# Altium PCB GPS_PCB.PcbDoc
Units mm, origin at the board's own origin, x right, y up, seen from the top; angles counter-clockwise.
Board outline 41.78 x 44.96 mm, 4 copper layers (Top Layer, Inner Layer L1, Inner Layer L3, Bottom Layer), stack 1.564 mm thick; 22 components, 16 nets, 77 pads, 50 vias.
Unrouted connection lines stored in the file: 1.
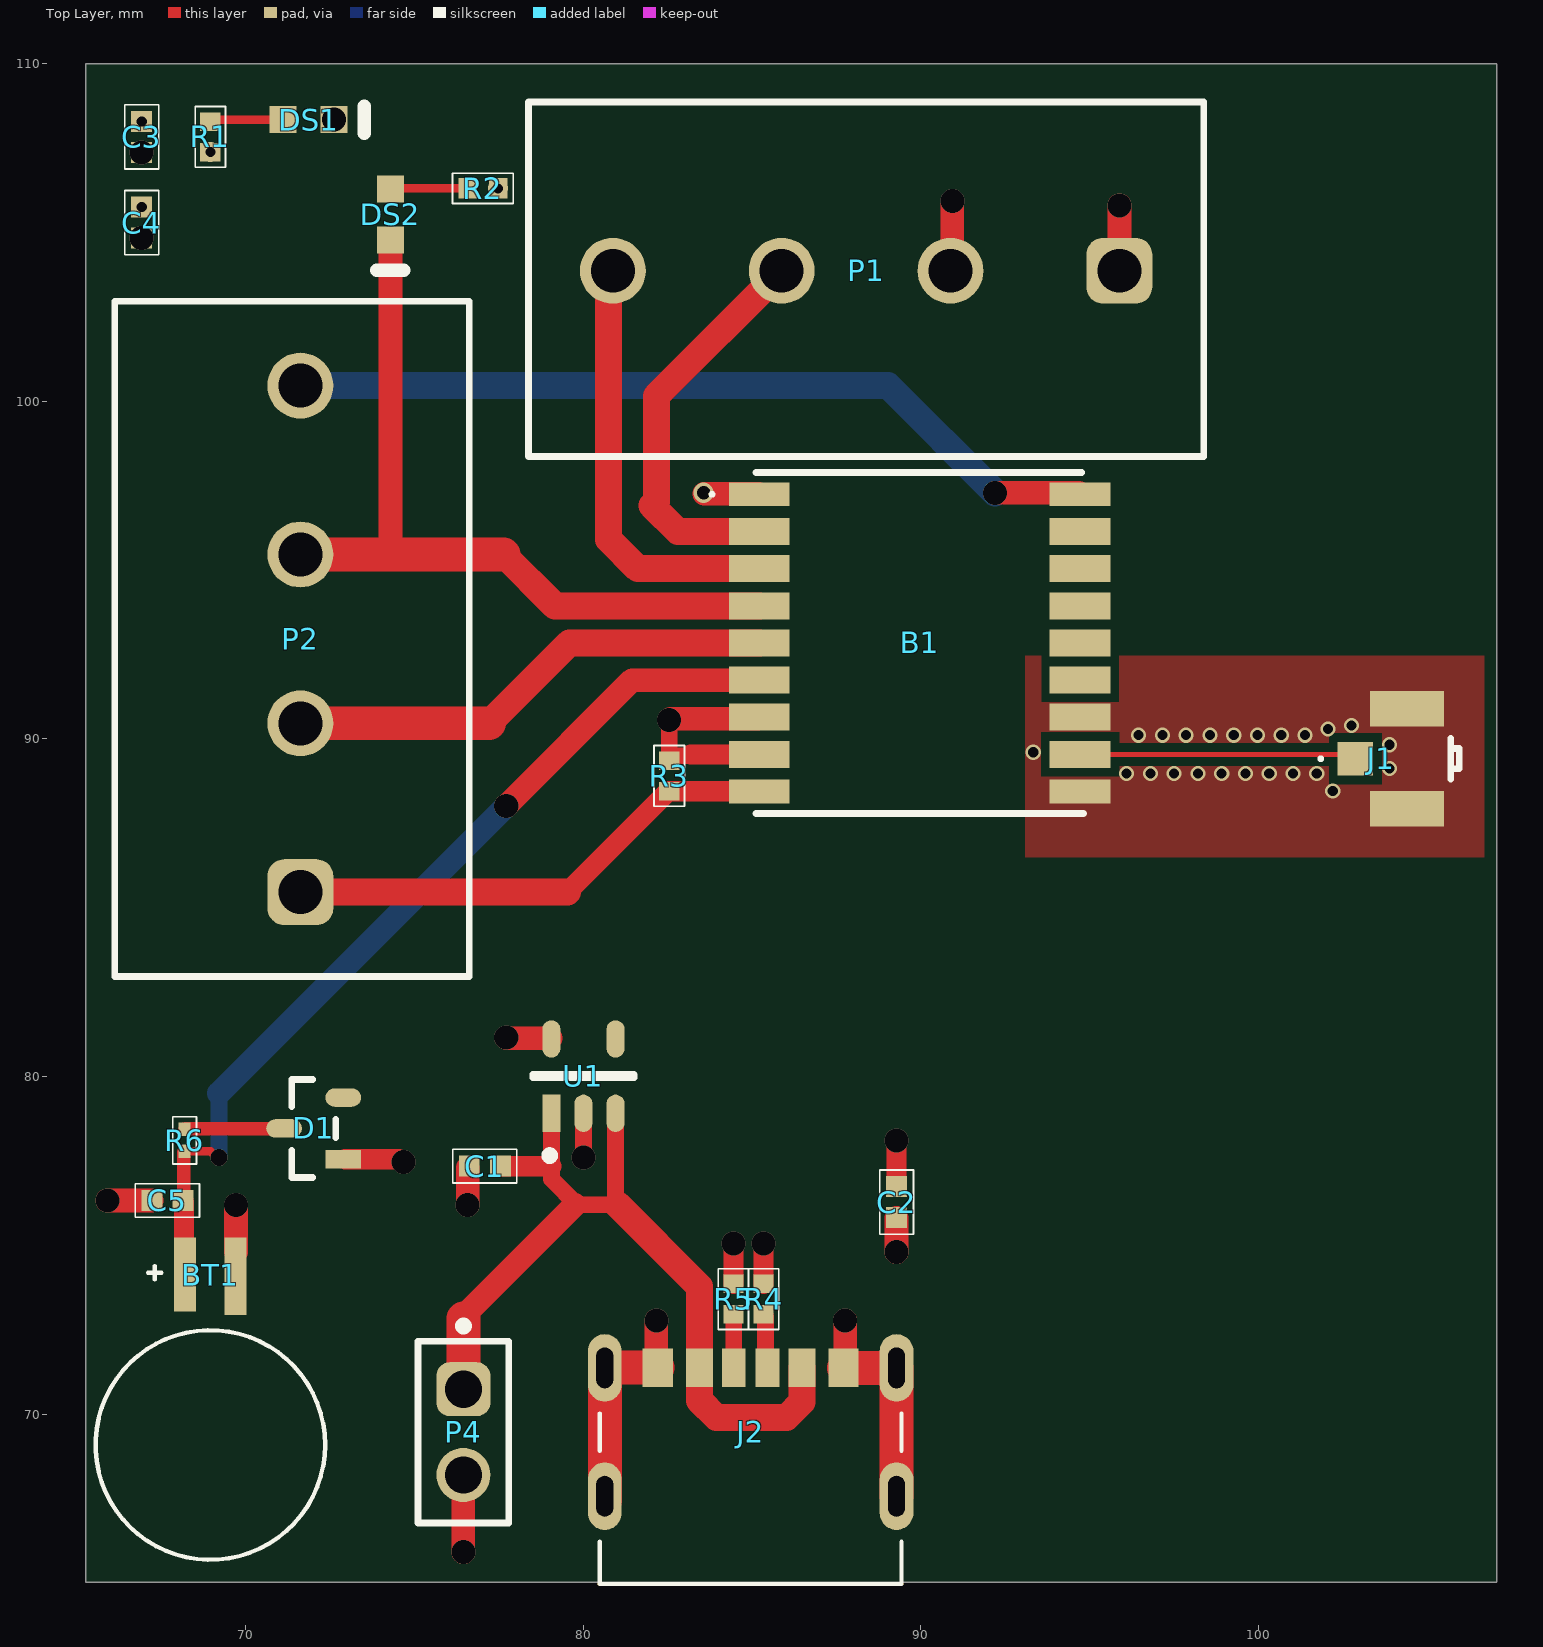
[diagram p0: Top Layer view]
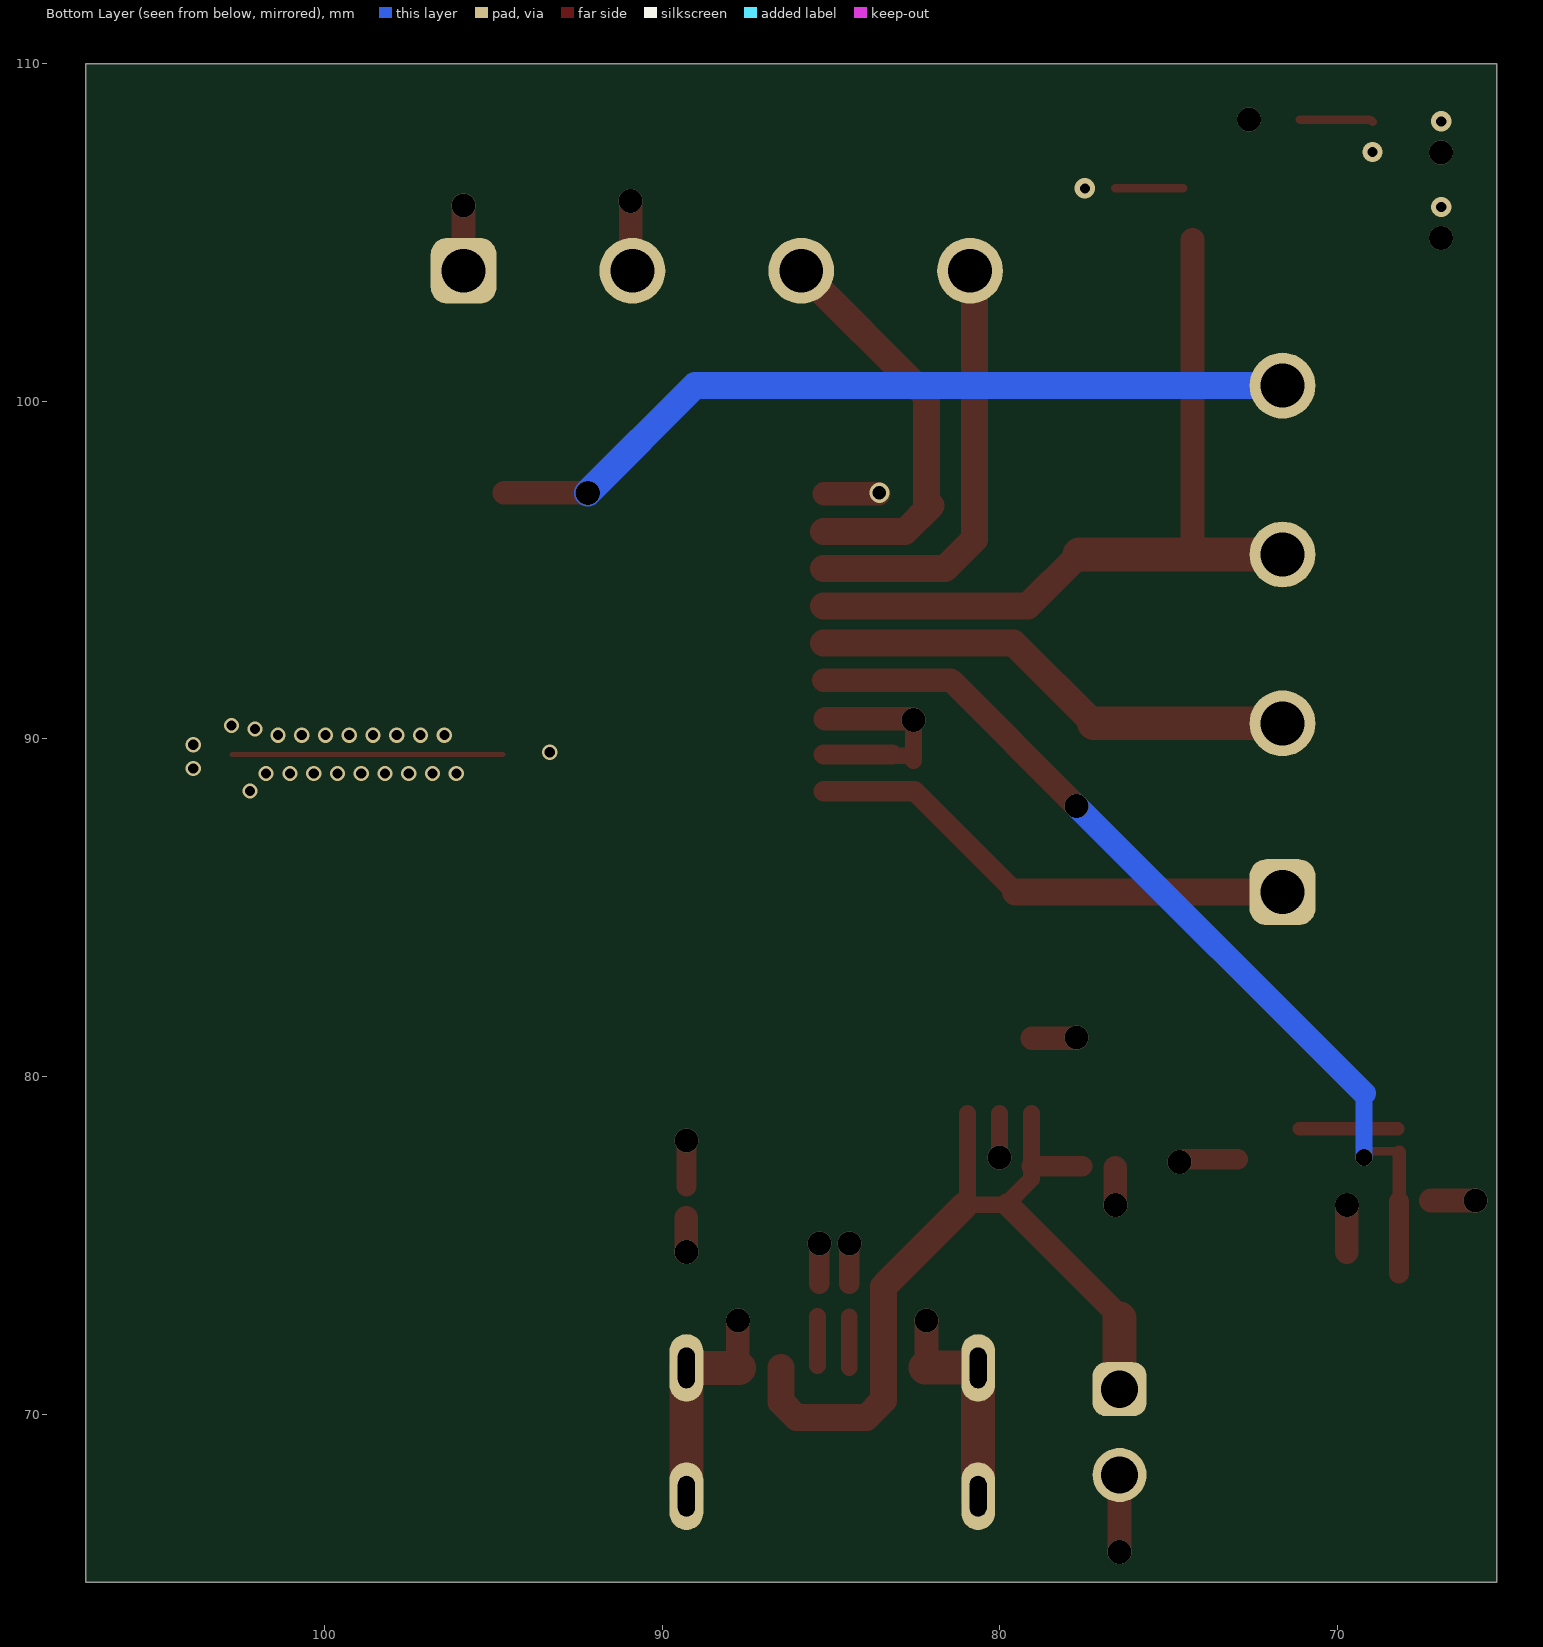
[diagram p1: Bottom Layer view, seen from below]
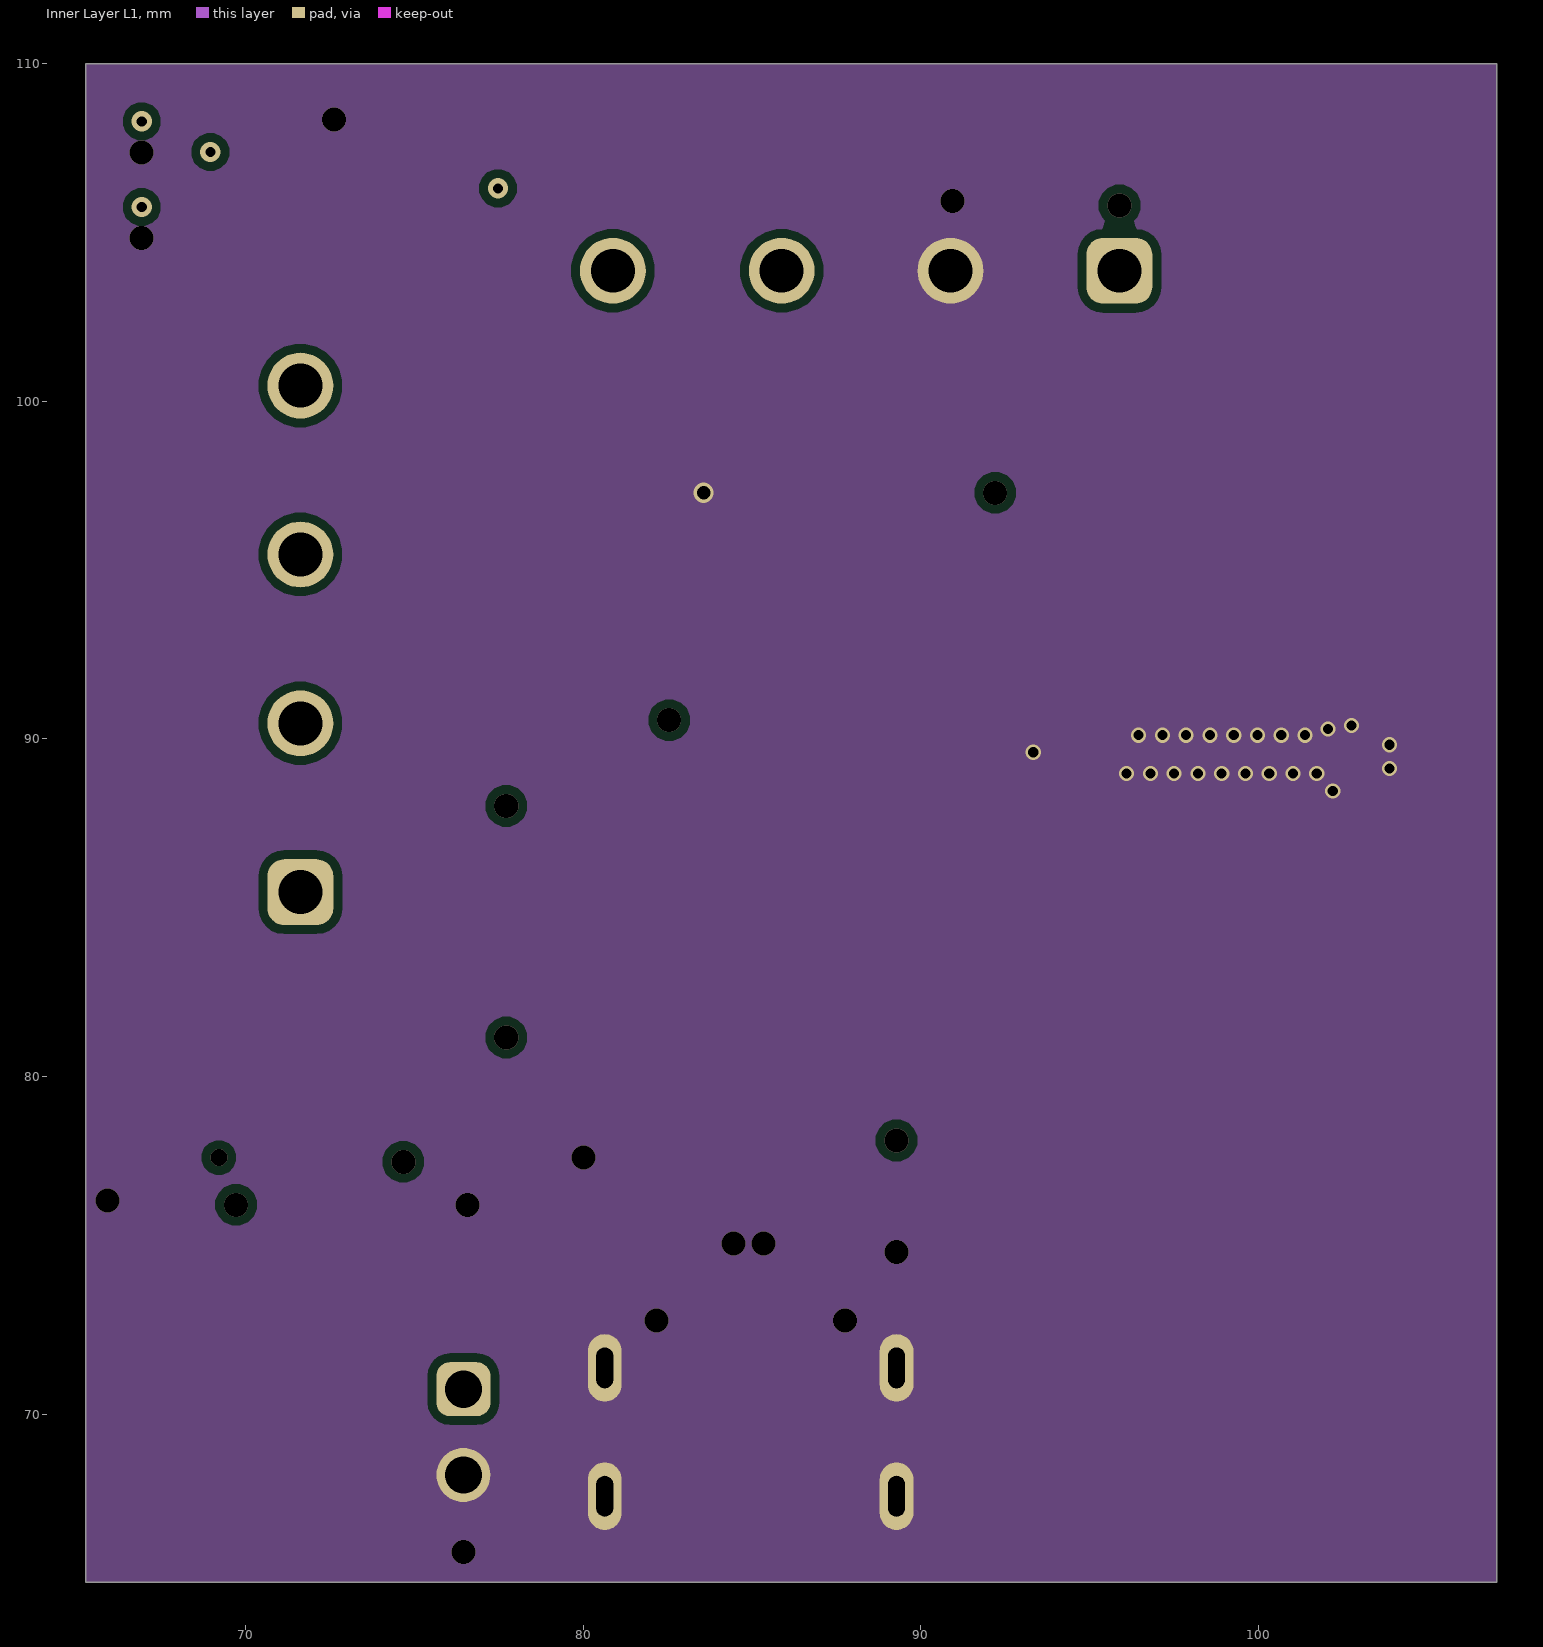
[diagram p2: Inner Layer L1]
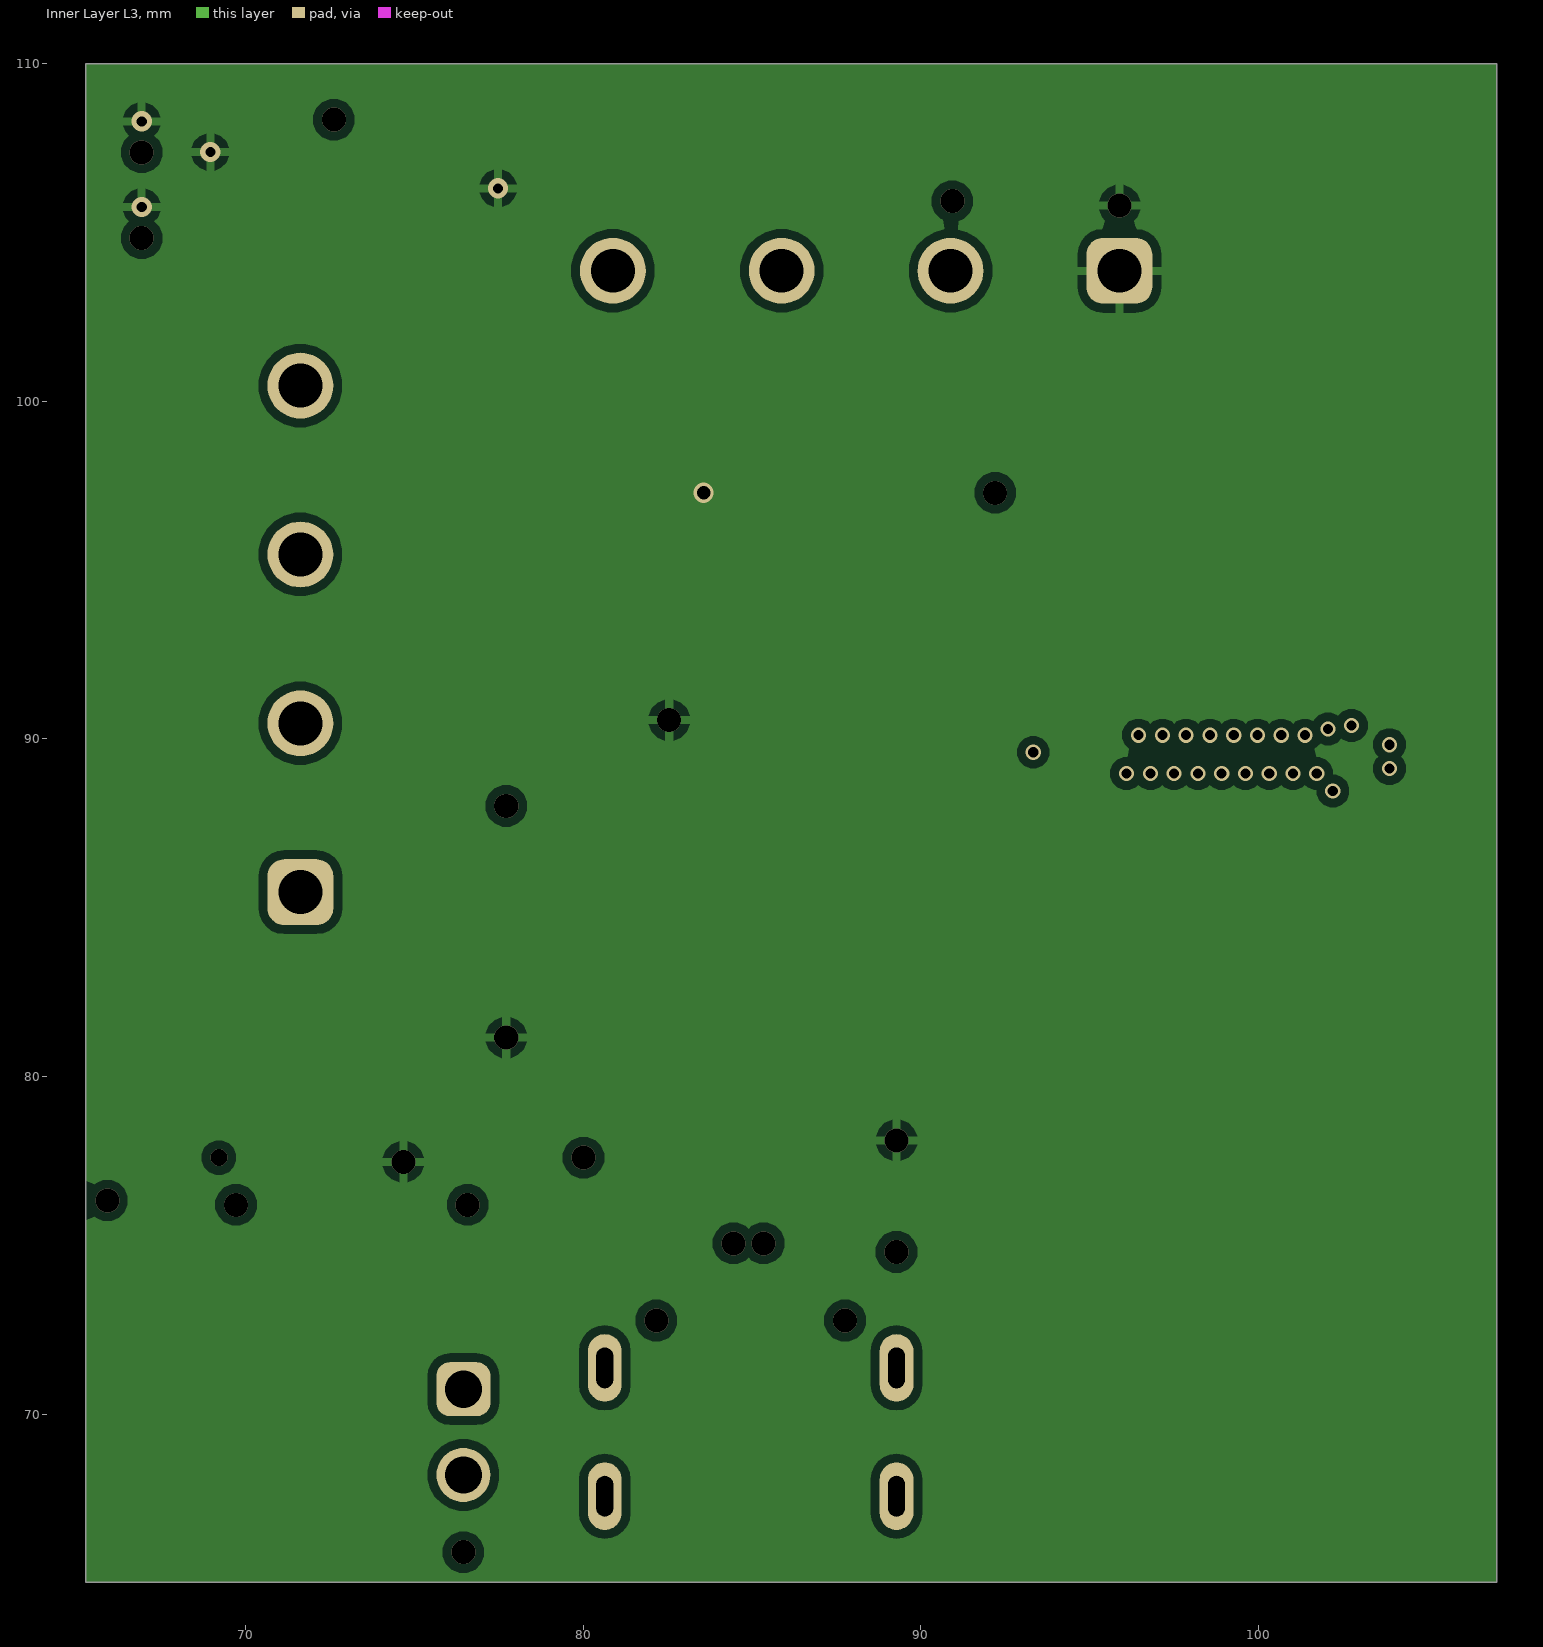
[diagram p3: Inner Layer L3]
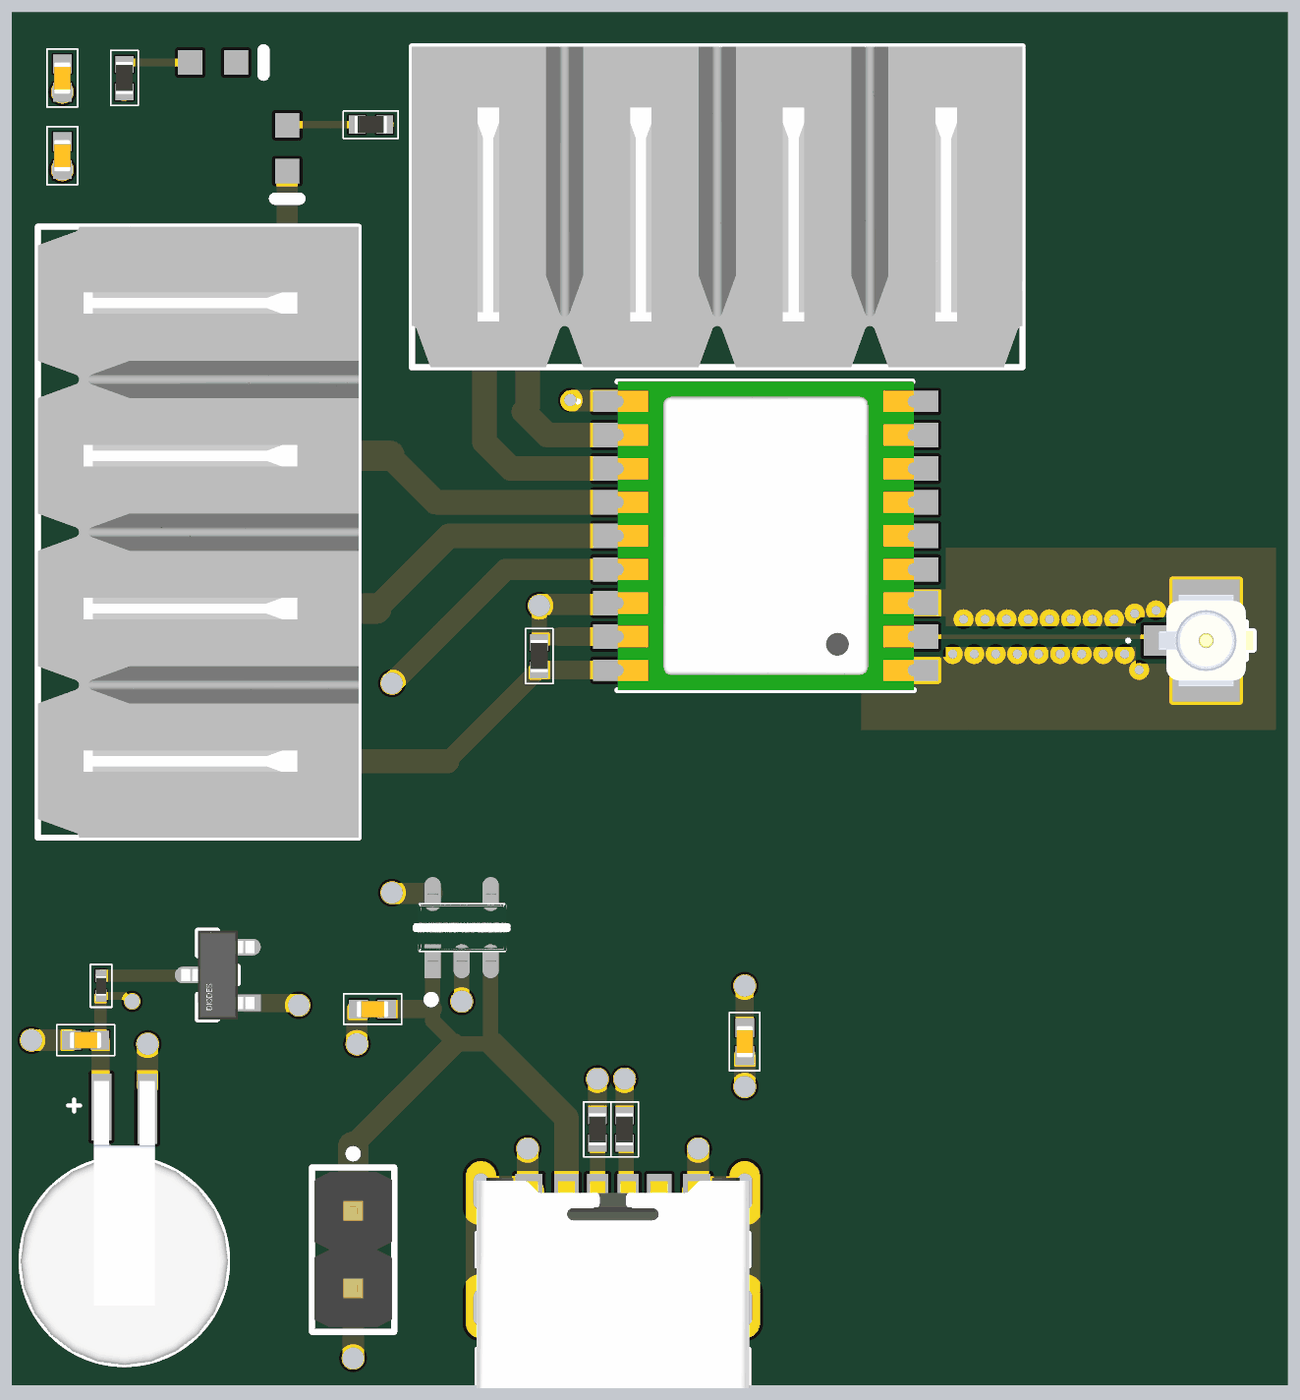
[diagram p4: 3D render of the assembled board from above, using the file's embedded part models]

## Layer stack, top to bottom
Top Solder: solder mask 0.0152, Solder Resist, Dk 3.8
Top Layer: signal copper 0.035
Prepeg 1: prepreg 0.0994, PP-015, Dk 4.1
Inner Layer L1: signal copper 0.0152
Core: core 1.265, FR-4, Dk 4.6
Inner Layer L3: signal copper 0.0152
Prepeg 2: prepreg 0.0994, PP-015, Dk 4.1
Bottom Layer: signal copper 0.035
Bottom Solder: solder mask 0.0152, Solder Resist, Dk 3.8

## Board outline
65.278,65.024 107.061,65.024 107.061,109.982 65.278,109.982

## Design rules (kind name [scope] priority, off if disabled: settings)
Clearance [All] p1: gap=0.254 ignorepadtopadclearanceinfootprint=FALSE
PolygonConnect PolygonConnect_2 [IsShieldingVia] p1: connectstyle=Direct reliefconductorwidth=0.254 reliefentries=4 polygonreliefangle="90 Angle" airgapwidth=0.254
PolygonConnect [InNet('GND')] p2: connectstyle=Direct reliefconductorwidth=0.254 reliefentries=4 polygonreliefangle="90 Angle" airgapwidth=0.254
PolygonConnect PolygonConnect_1 [All] p3: connectstyle=Relief reliefconductorwidth=0.254 reliefentries=4 polygonreliefangle="90 Angle" airgapwidth=0.254
RoutingVias [All] p1: holewidth=0.711 width=1.27 viastyle="Through Hole" minholewidth=0.711 minwidth=1.27 maxholewidth=0.711 maxwidth=1.27
SolderMaskExpansion [All] p1: expansion=0.102 istentingtop=FALSE
SupplyNets "Schematic Supply Nets" [InNet('GND')] p1: voltage=0.000
Width [InNetClass('RF')] p1: maxlimit=0.148 minlimit=0.148 preferedwidth=0.148 impedanceprofiledriven=TRUE impedanceprofileid={130DF238-4679-42AC-8F3F-ED2540BAD80D} impedanceprofilevalue=50.000000 minimp=50.000000 maximp=50.000000 favimp=50.000000
Width Width_1 [All] p2: maxlimit=5 minlimit=0.01 preferedwidth=0.254 minimp=50.000000 maximp=50.000000 favimp=50.000000
30 further rules are at their usual default settings.

## Classes and differential pairs
net class RF: RFIN

## Components (designator, comment, footprint, x,y, rotation, side; value= is the part's Value field where it differs from the comment)
B1 "MAX-M10M-00B" MAXM10M00B 89.967,92.837 r180 top
BT1 "MS621FE-FL11E" BAT_MS621FE-FL11E 68.961,69.088 r90 top
C1 "1uF" CAP_0402 77.089,77.343 r0 top
C2 "1uF" CAP_0402 89.281,76.279 r90 top
C3 "100 nF" CAP_0402 66.929,107.823 r90 top
C4 "1 uF" CAP_0402 66.929,105.283 r90 top
C5 "1 uF" CAP_0402 67.691,76.327 r0 top
D1 "BAT54-7-F" FP-SOT23-IPC_C 72.021,78.46 r180 top value=10pF
DS1 "HSMH-C190" HSMH-C190 71.87,108.331 r0 top
DS2 "HSMH-C190" HSMH-C190 74.295,105.525 r270 top
J1 "U.FL-R-SMT_10_" UFLRSMT10 104.394,89.408 r270 top
J2 "UJC-HP-3-SMT-TR" CUI_UJC-HP-3-SMT-TR 84.961,71.369 r0 top
P1 "691386700004" CMP-1502-02092-3 88.38,103.607 r180 top
P2 "691386700004" CMP-1502-02092-3 71.378,92.957 r90 top
P4 "61300211121" 61300211121 76.454,69.469 r270 top
R1 "330 Ω" RES_0402 68.961,107.823 r90 top
R2 "330 Ω" RES_0402 77.031,106.299 r180 top
R3 "10 kΩ" RES_0402 82.55,88.9 r90 top
R4 "5.1 kΩ" RES_0402 85.344,73.406 r270 top
R5 "5.1 kΩ" RES_0402 84.455,73.406 r90 top
R6 "3.3 kΩ" RES_0201 68.199,78.105 r270 top
U1 "AP2112K-3.3TRG1" FP-SOT25-IPC_C 80.01,80.01 r90 top

## Footprints (in the part's own frame and the unit in brackets; to place one, negate y for a bottom-side part, rotate by r counter-clockwise, add the part's x,y. Pads: shape width x height; smd on the part's side, far side on the other; paste and mask are expansions set on the pad)
61300211121 [mm] "Pin Header, pitch 2.54 mm, THT, Vertical, single row, 2p"
  rrect50% 1.6x1.6 hole 1.1: 1(-1.27,0)
  round 1.6 hole 1.1: 2(1.27,0)
  silkscreen extent -3.26,-1.35 2.69,1.35, body extent -2.54,-1.27 2.54,1.27, height 8.57
BAT_MS621FE-FL11E [mm]
  rect 2.3x0.65 smd: NEG(5,-0.75)
  rect 2.2x0.65 smd: POS(5.05,0.75)
  silkscreen extent -3.4,-3.4 5.3,3.4, body extent -3.4,-3.4 5.9,3.4, height 2.8
CAP_0402 [mm]
  rect 0.62x0.62 smd mask+0.05: 1(-0.46,0) 2(0.46,0)
  silkscreen extent -0.95,-0.5 0.95,0.5, body extent -0.53,-0.28 0.53,0.28, height 0.55
CMP-1502-02092-3 [mm] "5.00mm - PCB Header ( Horizontal / Vertical ), 04p"
  rrect50% 1.95x1.95 hole 1.3: 1(-7.5,-0.25)
  round 1.95 hole 1.3: 2(-2.5,-0.25) 3(2.5,-0.25) 4(7.5,-0.25)
  silkscreen extent -10,-5.25 10,5.25, body extent -10,-5.25 10,5.25, height 11
CUI_UJC-HP-3-SMT-TR [mm]
  rect 0.7x1.15 smd: A5(-0.5,0.005) B5(0.5,0.005)
  rect 0.8x1.15 smd: A9(1.52,0.005) B9(-1.52,0.005)
  rect 0.9x1.15 smd: A12(2.75,0.005) B12(-2.75,0.005)
  oval 1x2 hole 0.5 slot 1.2 at 90 deg: S1(-4.32,0) S2(4.32,0) S3(-4.32,-3.8) S4(4.32,-3.8)
  silkscreen extent -4.47,-6.4 4.47,-1.35, body extent -4.47,-6.44 4.47,0.46, height 3.3
FP-SOT23-IPC_C [mm]
  rect 1.059x0.547 smd paste+0 mask+0: 1(-0.877,0.915)
  rrect100% 1.059x0.547 smd paste+0 mask+0: 2(-0.877,-0.915) 3(0.877,0)
  silkscreen extent -0.65,-1.45 0.65,1.45, body extent -1.51,-1.55 1.51,1.55, height 0.25
FP-SOT25-IPC_C [mm]
  rect 1.107x0.536 smd paste+0 mask+0: 1(-1.101,0.95)
  rrect100% 1.107x0.536 smd paste+0 mask+0: 2(-1.101,0) 3(-1.101,-0.95) 4(1.101,-0.95) 5(1.101,0.95)
  silkscreen extent -2.48,-1.5 0.05,1.5, body extent -1.75,-1.6 1.75,1.6, height 0.25
HSMH-C190 [mm] "SMD, 2-Leads, Body 1.6x0.8mm, Height 0.9mm"
  rect 0.8x0.8 smd: 1(-0.75,0) 2(0.75,0)
  silkscreen extent 1.65,-0.4 1.65,0.4, body extent -0.8,-0.4 0.8,0.4, height 0.9
MAXM10M00B [mm]
  rect 1.8x0.7 smd: 1(4.75,-4.4) 9(4.75,4.4) 10(-4.75,4.4) 18(-4.75,-4.4)
  rect 1.8x0.8 smd: 2(4.75,-3.3) 3(4.75,-2.2) 4(4.75,-1.1) 5(4.75,0) 6(4.75,1.1) 7(4.75,2.2) 8(4.75,3.3) 11(-4.75,3.3) 12(-4.75,2.2) 13(-4.75,1.1) 14(-4.75,0) 15(-4.75,-1.1) 16(-4.75,-2.2) 17(-4.75,-3.3)
  silkscreen extent -4.85,-5.05 6.2,5.05, body extent -4.85,-5.05 4.85,5.05, height 2.5
RES_0201 [mm]
  rect 0.4x0.35 smd mask+0.05: 1(-0.325,0) 2(0.325,0)
  silkscreen extent -0.7,-0.35 0.7,0.35, body extent -0.32,-0.17 0.32,0.17, height 0.26
RES_0402 [mm]
  rect 0.55x0.6 smd mask+0.05: 1(-0.45,0) 2(0.45,0)
  silkscreen extent -0.9,-0.45 0.9,0.45, body extent -0.53,-0.28 0.53,0.28, height 0.4
UFLRSMT10 [mm]
  rect 1x1.05 smd: 1(0,-1.525)
  rect 1.05x2.2 smd: 2(-1.475,0) 3(1.475,0)
  silkscreen extent -0.6,-2.6 0.6,1.55, body extent -1.5,-1.55 1.5,1.55, height 1.25

## Part data
B1: "GPS Modules u-blox M10 GNSS LCC module, firmware in ROM, crystal oscillator", Manufacturer_Name=u-blox, Mouser Part Number=377-MAX-M10M-00B, Arrow Part Number=MAX-M10M-00B, Arrow Price/Stock=https://www.arrow.com/en/products/max-m10m-00b/u-blox?utm_currency=USD&region=nac, Datasheet Link=https://content.u-blox.com/sites/default/files/documents/MAX-M10M_IntegrationManual_UBX-22038241.pdf, Geometry.Height=2.7mm, Manufacturer_Part_Number=MAX-M10M-00B, Mouser Price/Stock=https://www.mouser.co.uk/ProductDetail/u-blox/MAX-M10M-00B?qs=A6eO%252BMLsxmQGh8%2FJ1ZmexA%3D%3D
BT1: "Coin, 6.8mm 3 V Lithium Battery Rechargeable (Secondary) 5.5mAh", Package="QFP-128 Seiko", Availability="In Stock", Check_prices=https://www.snapeda.com/parts/MS621FE-FL11E/Seiko+Instruments/view-part/?ref=eda, MF="Seiko Instruments", MP=MS621FE-FL11E, Price=None, Purchase-URL=https://pricing.snapeda.com/search/part/MS621FE-FL11E/?ref=eda, SnapEDA_Link=https://www.snapeda.com/parts/MS621FE-FL11E/Seiko+Instruments/view-part/?ref=snap
C1 C2 C3 C4 C5: library part CAP_0402, "Capacitor SMD 0402 Generic", Capacitance="100 pF", LCSC Part Number=C106200, Manufacturer=YAGEO, Manufacturer Part Number=CC0402JRNPO9BN101, Tolerance=5%
D1: library part CMP-0303-00002-2, "DIODE SCHOTTKY 30V 200MA SOT23-3", Capacitance=10pF, Forward Current=200mA, Manufacturer="Diodes Inc.", Max Junction Temp=+150°C, Max Repetitive Reverse Voltage=30V, Max Surge Forward Current=600mA, Package=SOT23, Peak Reverse Current=2uA, Temperature="-65°C to +150°C", Temperature Range Low=-65°C, Automotive=No, Automotive Grade=NA, Category=Diode, ComponentLink2Description=Datasheet, ComponentLink2URL=https://www.diodes.com/assets/Datasheets/ds11005.pdf, Device Class L1="Discrete Semiconductors", Device Class L2=Diodes, Device Class L3="Schottky Diodes", Digikey Description="DIODE SCHOTTKY 30V 200MA SOT23-3", Footprint Url=https://www.diodes.com/assets/Package-Files/SOT23.pdf, Height=1.1mm, Lead Free=Yes, Manufacturer Part Number=BAT54-7-F, Mouser Description="Switching diode SOT-23 30 V 200 mA | Diodes Incorporated BAT547F (Switching diode SOT-23 30 V 200 mA Diodes).", Octopart=https://octopart.com/bat54-7-f-diodes+inc.-39681803, Reverse Voltage=30V, RoHS=TRUE, Standoff Height=0.013mm, Temperature Range High=+150°C
DS1 DS2: "LED Uni-Color Red, 65 mW, 20 mA, -40 to 85 degC, 2-Pin SMD, RoHS, Tape and Reel", Current Rating="1 A", Max Operating Temperature="85 degC", Min Operating Temperature="-30 degC", Package Quantity=2000, ComponentLink1Description="Manufacturer URL", ComponentLink1URL=http://www.avagotech.com/, ComponentLink2Description=Datasheet, ComponentLink2URL=http://docs.avagotech.com/docs/AV02-0551EN, ComponentLink3Description="Package Specification", ComponentLink3URL=http://www.fairchildsemi.com/dwg/MA/MA03D.pdf, Connector Type=USB, Contact Material=Copper, Contact Plating=Gold, DatasheetVersion=Mar-12, Gender=Male, Height="2.8 mm", Lead Pitch="0.65 mm", Length="7.5 mm", Mount="Surface Mount", PackageDescription="2-Pin Surface Mount Device, Body 1.6 x 0.8 mm, Height 0.9 mm", PackageReference=HSMX-C190, Packaging="Tape and Reel", Pins=5, REACH SVHC="No SVHC", RoHSCompliant=true, Width="5.6 mm"
J1: "U.FL (UMCC) Connector Receptacle, Male Pin 50 Ohms Surface Mount Solder", Arrow Part Number=U.FL-R-SMT(10), Manufacturer_Name=Hirose, Mouser Part Number=798-U.FL-R-SMT10, Arrow Price/Stock=https://www.arrow.com/en/products/u.fl-r-smt-10/hirose-electric?utm_currency=USD&region=nac, Datasheet Link=https://eu.mouser.com/datasheet/2/185/hiros05388_1-2269186.pdf, Geometry.Height=1.45mm, Manufacturer_Part_Number=U.FL-R-SMT(10), Mouser Price/Stock=https://www.mouser.co.uk/ProductDetail/Hirose-Connector/U.FL-R-SMT10?qs=Ux3WWAnHpjBT1CWD8UMEMQ%3D%3D
J2: Package=None, Availability=Unavailable, MP=UJC-HP-3-SMT-TR, Price=None
P1 P2: library part CMP-1502-02092-3, "Terminal Block, 5.00MM, Male Pcb Horizontal/vertical Cab Divisible, 4 Pins", Color=Grey, Current=14A, Max Operating Temperature=130°C, Min Operating Temperature=-30°C, Voltage=300V, Lead Pitch=5mm, Mount="Through Hole", Number of Levels=1, Number of Pins=4, Number of Positions=4, Number of Positions Per Level=4, Orientation=Vertical, Packaging=Box, Pitch=5.0038mm, RoHS=Compliant, Termination=Solder
P4: library part CMP-1712-00002-7, "THT Vertical Pin Header WR-PHD, Pitch 2.54 mm, Single Row, 2 pins", Color=Black, Contact Resistance=20mΩ, Current Rating=3A, Max Operating Temperature=105°C, Min Operating Temperature=-40°C, Operating Supply Voltage=250V, Connector Type="Male Pin", Contact Gender=Male, Contact Material=Gold, Contact Mating Length=5.9944mm, Contact Plating=Gold, Gender=Male, Height=8.94mm, Housing Material=PBT, Lead Free="Lead Free", Lead Pitch=2.54mm, Mount="Through Hole", Number of Contacts=2, Number of Pins=2, Number of Positions=2, Number of Rows=1, Orientation=Vertical, Packaging=Bulk, Pitch=2.54mm, REACH SVHC=No, RoHS=Compliant, Termination="Through Hole", Voltage Rating=250V
R1 R2 R3 R4 R5: library part RES_0402, "Resistor SMD 0402 Generic", LCSC Part Number=C93947, Manufacturer=YAGEO, Manufacturer Part Number=RC0402FR07150KL, Resistance="150 kOhm", Tolerance=1%
R6: library part RES_0201, "Resistor SMD 0201 Generic", LCSC Part Number=C852221, Manufacturer=YAGEO, Manufacturer Part Number=RT0201BRD07200RL, Resistance="200 Ohm", Tolerance=0.1%
U1: library part CMP-12756-000035-1, "IC REG LINEAR 3.3V 600MA SOT25", Case/Package=SOT-23-5, Dropout Voltage=250mV, Max Input Voltage=6V, Max Operating Temperature=85°C, Max Output Current=600mA, Min Input Voltage=2.5V, Min Operating Temperature=-40°C, Output Voltage=3.3V, Package Quantity=1, Quiescent Current=55uA, Accuracy=1.5%, Height=1.3mm, Lead Free="Lead Free", Length=3.1mm, Mount="Surface Mount", Number of Outputs=1, Number of Pins=5, Number of Regulators=1, Output Current=600mA, Output Type=Fixed, Packaging="Tape and Reel", Polarity=Positive, Width=1.7mm

## Via types
v1: diameter 0.45, hole 0.3, Top Layer to Bottom Layer, 23 vias
v2: diameter 0.711, hole 0.711, Top Layer to Bottom Layer, 21 vias
v3: diameter 0.6, hole 0.3, Top Layer to Bottom Layer, tented both sides, 4 vias
v4: diameter 0.6, hole 0.4, Top Layer to Bottom Layer, 1 vias
v5: diameter 0.5, hole 0.5, Top Layer to Bottom Layer, 1 vias

## Nets (pads, with @x,y where several pads share a name; then routed paths per layer and width w, separated by ;. In a path a pad name is that pad's centre, name@x,y a point inside that pad or via, vN(x,y) a via of type N, cw(c..) or ccw(c..) an arc to the next point about the centre after c; other vN are vias at no path point)
3V3: B1.7 B1.8 C2.2 C3.2 C4.2 D1.1 P1.1 R1.1 R2.1 R3.2 U1.5 | length 12.9
  Top Layer w0.254: D1.1 D1.1@72.924,77.571 ; v2(77.724,81.153) v2@77.745,81.132 ; U1.5@79.039,81.132 U1.5 ; 83.148,89.498 83.187,89.537
  Top Layer w0.5: D1.1@72.924,77.568 D1.1@72.947,77.545 ; v2@74.544,77.545 74.619,77.47 v2(74.676,77.47) ; R3.2 v2(82.55,90.551) v2@82.59,90.591 ; R3.2@82.698,89.498 83.148,89.498 ; B1.7@85.171,90.591 B1.7
  Top Layer w0.6: D1.1@72.947,77.545 v2@74.544,77.545 ; 83.187,89.537 B1.8 ; C2.2 v2(89.281,78.105)
  Top Layer w0.7: v2@77.745,81.132 U1.5@79.039,81.132 ; v2@82.59,90.591 B1.7@85.171,90.591 ; P1.1@95.885,103.889 95.883,103.891 95.883,105.789 v2(95.885,105.791)
  other v3: 66.929,105.743 77.481,106.299 68.961,107.373 66.929,108.283
EINT: B1.5 P2.2 | length 14.6
  Top Layer w0.8: 77.212,90.457 79.592,92.837 B1.5
  Top Layer w1: P2.2 77.212,90.457
GND: B1.1 B1.10 B1.12 BT1.NEG C1.1 C2.1 C3.1 C4.1 C5.1 DS1.2 J1.2 J1.3 J2.A12 J2.B12 J2.S1 J2.S2 J2.S3 J2.S4 P1.2 P4.2 R4.1 R5.2 U1.2 | length 27.8
  Top Layer w0.254: C1.1@76.581,77.295 C1.1 ; v4(83.566,97.282) v4@83.589,97.259 ; B1.1@85.195,97.259 B1.1 ; J2.A12 J2.A12@87.716,71.369
  Top Layer w0.5: v2(80.01,77.597) U1.2
  Top Layer w0.6: R5.2 v2(84.455,75.057) ; R4.1 v2(85.344,75.057)
  Top Layer w0.7: v2(65.913,76.327) C5.1 ; BT1.NEG@69.723,74.803 69.723,76.121 ; v2(76.454,65.913) P4.2 ; v2(76.581,76.2) C1.1@76.581,77.295 ; J2.B12@82.169,71.42 v2(82.169,72.771) ; v4@83.589,97.259 B1.1@85.195,97.259 ; J2.A12@87.757,71.42 v2(87.757,72.771) ; v2(89.281,74.803) C2.1 ; P1.2@90.93,103.891 v2@90.93,105.789
  Top Layer w1: J2.S3@80.645,67.442 J2.S1@80.645,71.242 ; J2.S1@80.645,71.379 J2.B12@82.21,71.379 ; J2.A12@87.716,71.369 J2.S2 J2.S4
  other v1: 102.2,88.448 96.093,88.968 96.797,88.968 97.501,88.968 98.205,88.968 98.909,88.968 99.613,88.968 100.317,88.968 101.021,88.968 101.725,88.968 103.882,89.12 93.329,89.599 103.882,89.824 96.449,90.106 97.153,90.106 97.857,90.106 98.561,90.106 99.265,90.106 99.969,90.106 100.673,90.106 101.377,90.106 102.056,90.291 102.752,90.396
  other v2: 66.929,104.823 90.932,105.918 66.929,107.363 72.62,108.331
NetD1_3: D1.3 R6.1 | length 2.9
  Top Layer w0.254: R6.1@68.212,78.443 R6.1@68.214,78.445 ; D1.3@71.13,78.445 D1.3
  Top Layer w0.4: R6.1@68.214,78.445 D1.3@71.13,78.445
NetDS1_1: DS1.1 R1.2 | length 2.2
  Top Layer w0.254: R1.2 cw(c69.101,108.133) 69.101,108.331 DS1.1
NetDS2_1: DS2.1 R2.2 | length 2
  Top Layer w0.254: DS2.1@74.568,106.299 R2.2
NetJ2_A5: J2.A5 R5.1 | length 1.5
  Top Layer w0.254: R5.1@84.457,72.887 R5.1@84.459,72.885 ; J2.A5@84.459,71.376 J2.A5
  Top Layer w0.5: J2.A5@84.459,71.376 R5.1@84.459,72.885
NetJ2_B5: J2.B5 R4.2 | length 1.6
  Top Layer w0.254: R4.2 R4.2@85.402,72.897 ; J2.B5@85.402,71.433 J2.B5
  Top Layer w0.5: J2.B5@85.402,71.433 R4.2@85.402,72.897
PPS: B1.4 DS2.2 P2.3 | length 23.5
  Top Layer w0.7: 74.295,95.457 DS2.2
  Top Layer w0.8: 77.642,95.457 79.162,93.937 B1.4
  Top Layer w1: P2.3 74.295,95.457 77.642,95.457
RFIN: B1.11 J1.1 | length 8
  Top Layer w0.148: B1.11 J1.1@102.74,89.537
RST: B1.9 P2.1 R3.1 | length 14.8
  Top Layer w0.254: R3.1@82.525,88.45 R3.1 ; B1.9@85.211,88.444 B1.9
  Top Layer w0.6: 79.532,85.457 R3.1@82.525,88.45 ; R3.1@82.556,88.444 B1.9@85.211,88.444
  Top Layer w0.8: P2.1 79.532,85.457
RXD: B1.3 P1.4 | length 12.8
  Top Layer w0.8: P1.4 80.753,103.73 80.753,95.904 81.62,95.037 B1.3
SAFE: B1.18 P2.4 | length 24.4
  Top Layer w0.7: v2(92.202,97.282) B1.18@94.672,97.282
  Bottom Layer w0.8: P2.4 89.027,100.457 v2(92.202,97.282)
TXD: B1.2 P1.3 | length 12
  Top Layer w0.8: B1.2 82.806,96.137 82.042,96.901 82.169,97.028 82.169,100.146 P1.3
VBAT: B1.6 BT1.POS C5.2 R6.2 | length 27.7
  Top Layer w0.254: C5.2 C5.2@68.181,76.297 ; R6.2@68.175,77.756 R6.2 68.965,77.78 69.148,77.597 v5(69.215,77.597) ; BT1.POS@68.181,74.168 BT1.POS
  Top Layer w0.4: C5.2@68.175,76.351 R6.2@68.175,77.756
  Top Layer w0.6: BT1.POS@68.181,74.168 C5.2@68.181,76.297
  Top Layer w0.7: v2(77.724,88.011) 81.45,91.737 B1.6
  Bottom Layer w0.5: v5(69.215,77.597) 69.215,79.502
  Bottom Layer w0.7: 69.215,79.502 v2(77.724,88.011)
VIN: C1.2 J2.A9 J2.B9 P4.1 U1.1 U1.3 | length 26.5
  Top Layer w0.254: 76.454,72.835 76.454,72.898 ; 79.755,76.199 79.819,76.199
  Top Layer w0.5: U1.1 79.06,77.343 79.06,76.958 79.819,76.199 81.025,76.199 ; 80.96,76.265 U1.3
  Top Layer w0.6: C1.2 79.06,77.343
  Top Layer w0.7: 76.454,72.898 79.755,76.199
  Top Layer w0.8: 81.025,76.199 83.405,73.82 ; 83.441,73.785 J2.B9 83.441,70.409 83.947,69.903 86.02,69.903 86.481,70.364 J2.A9
  Top Layer w1: P4.1 76.454,72.835
pads on no net: B1.13 B1.14 B1.15 B1.16 B1.17 D1.2 U1.4
copper on no net:
  other v2: 69.723,76.2

## Polygon pours and split planes (outlines as drawn)
GND on Top Layer "GND_L01_P000" (solid, pour order 0): 93.091,92.456 106.68,92.456 106.68,86.487 93.091,86.487
GND on Inner Layer L1 "GND_L02_P002" (solid, pour order 2): 65.278,65.024 107.061,65.024 107.061,109.982 65.278,109.982
3V3 on Inner Layer L3 "3V3_L03_P003" (solid, pour order 3): 65.278,65.024 107.061,65.024 107.061,109.982 65.278,109.982